# EAGLE board VisualightMicroDIY_03_gnd (EAGLE 6.2)
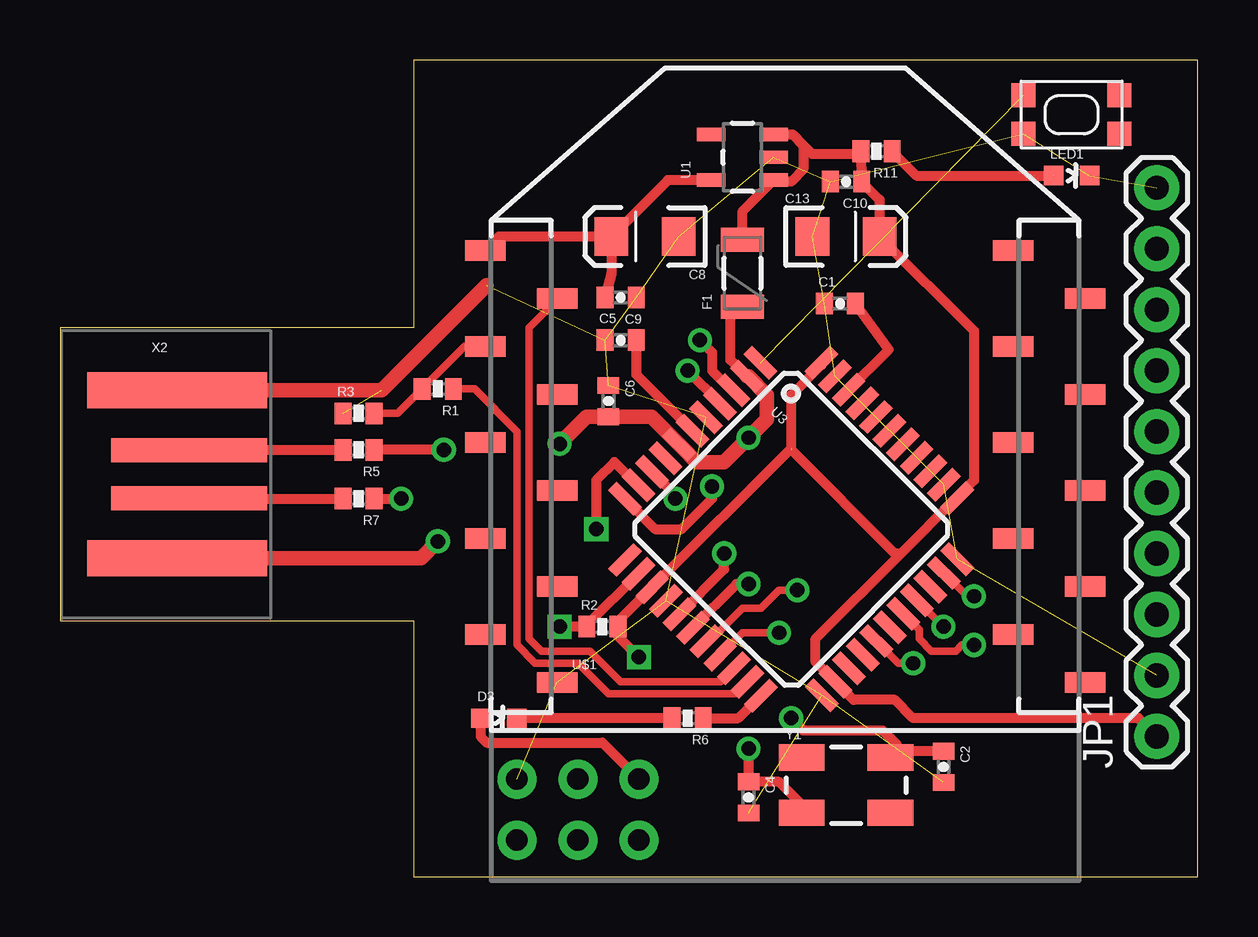
[diagram p0: board, top side]
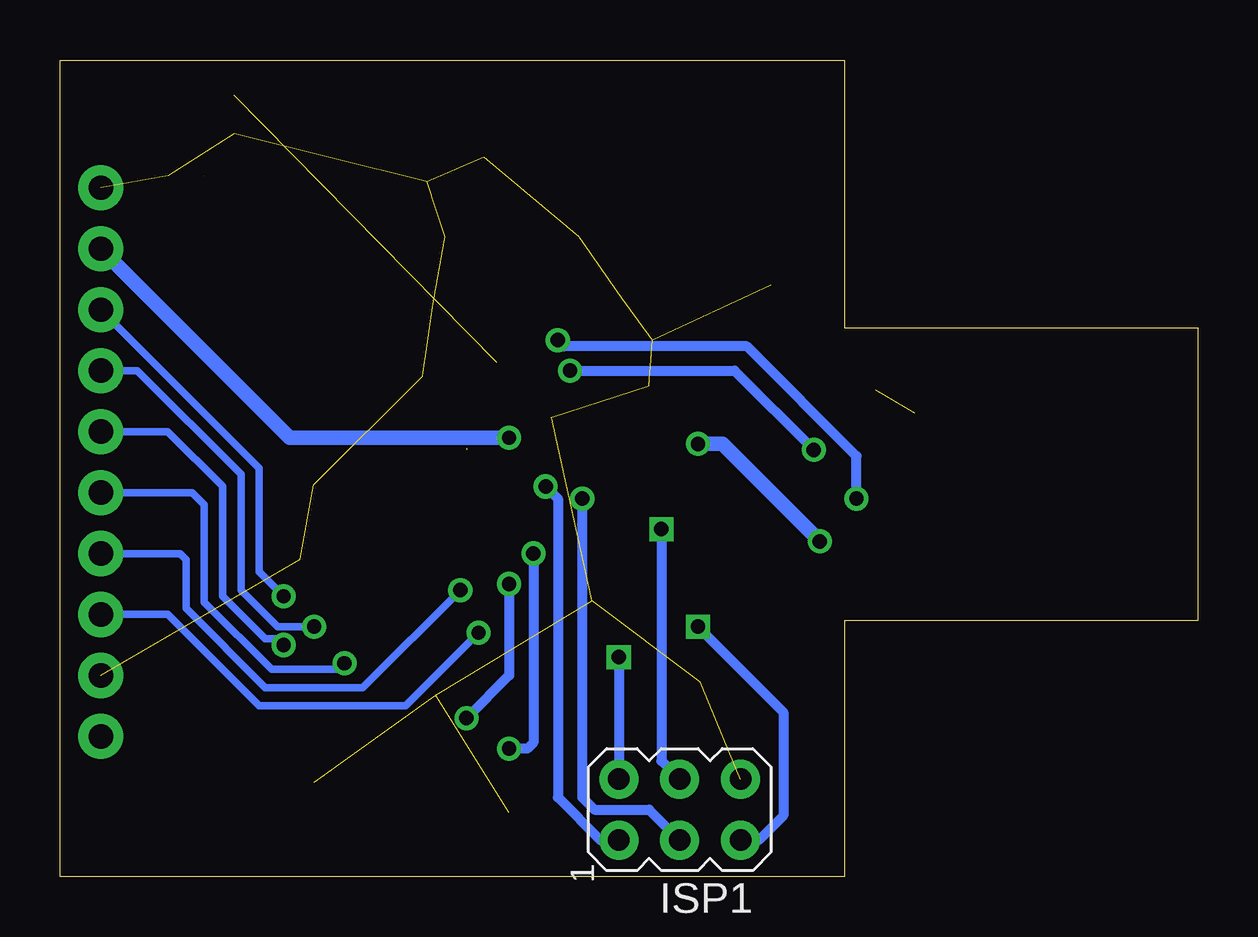
[diagram p1: board, bottom side, seen from below]

Size 47.42 x 34.03 mm. Coordinates in mm from the lower left corner, seen from the top.
Outline: 14.73,0 47.42,0 47.42,34.03 14.73,34.03 14.73,22.86 0,22.86 0,10.67 14.73,10.67 14.73,0
Copper layers (1*16): Top 0.035mm / dielectric 1.5mm / Bottom 0.035mm
Design rules: minimum track width 10mil, minimum drill 24mil, track to track 8mil, track to pad 8mil, pad to pad 8mil, via to via 8mil, smd to smd 8mil, copper to edge 40mil, drill to drill 8mil, minimum pad ring 10mil, minimum via ring 8mil, stop-mask expansion 4mil, vias tented up to drill 0mil, thermal gap 10mil
Net classes: 0 default: width 0.003 mm, drill 0.254 mm, clearance 0.152 mm

## Footprints (pad centres in the part's own frame; a part is rotated, then mirrored left to right if it is on the bottom)
0402-CAP = smd 0.7 x 0.9: 1 -0.65,0; 2 0.65,0
EIA3216 = smd 1.4 x 1.6: A 1.4,0; C -1.4,0
LED-0603 = smd 0.8 x 0.8: A 0,-0.75; C 0,0.75
PTC-1206 = smd 1 x 1.8: 1 -1.4,0; 2 1.4,0
AVRISP = drill 0.9 pad 1.626: 1 -1.27,2.54; 2 1.27,2.54; 3 -1.27,0; 4 1.27,0; 5 -1.27,-2.54; 6 1.27,-2.54
1X10 = drill 1.016 pad 1.88: 1 0,0; 2 2.54,0; 3 5.08,0; 4 7.62,0; 5 10.16,0; 6 12.7,0; 7 15.24,0; 8 17.78,0; 9 20.32,0; 10 22.86,0
0402-RES = smd 0.7 x 0.9: 1 -0.65,0; 2 0.65,0
KMR2 = smd 1 x 1: 1 2,0.8; 2 2,-0.8; 3 -2,0.8; 4 -2,-0.8
SOT23-5 = smd 0.55 x 1.2: 1 -0.95,-1.3; 2 0,-1.3; 3 0.95,-1.3; 4 0.95,1.3; 5 -0.95,1.3
SPARKFUN-DIGITALIC_TQFP44 = smd 1.5 x 0.5: 1 -5.8,4; 2 -5.8,3.2; 3 -5.8,2.4; 4 -5.8,1.6; 5 -5.8,0.8; 6 -5.8,0; 7 -5.8,-0.8; 8 -5.8,-1.6; 9 -5.8,-2.4; 10 -5.8,-3.2; 11 -5.8,-4; 23 5.8,-4; 24 5.8,-3.2; 25 5.8,-2.4; 26 5.8,-1.6; 27 5.8,-0.8; 28 5.8,0; 29 5.8,0.8; 30 5.8,1.6; 31 5.8,2.4; 32 5.8,3.2; 33 5.8,4 | smd 0.5 x 1.5: 12 -4,-5.8; 13 -3.2,-5.8; 14 -2.4,-5.8; 15 -1.6,-5.8; 16 -0.8,-5.8; 17 0,-5.8; 18 0.8,-5.8; 19 1.6,-5.8; 20 2.4,-5.8; 21 3.2,-5.8; 22 4,-5.8; 34 4,5.8; 35 3.2,5.8; 36 2.4,5.8; 37 1.6,5.8; 38 0.8,5.8; 39 0,5.8; 40 -0.8,5.8; 41 -1.6,5.8; 42 -2.4,5.8; 43 -3.2,5.8; 44 -4,5.8
XBEE-SMD = smd 1.7 x 0.85: 1 -12.5,20; 2 -9.5,18; 3 -12.5,16; 4 -9.5,14; 5 -12.5,12; 6 -9.5,10; 7 -12.5,8; 8 -9.5,6; 9 -12.5,4; 10 -9.5,2; 11 12.5,2; 12 9.5,4; 13 12.5,6; 14 9.5,8; 15 12.5,10; 16 9.5,12; 17 12.5,14; 18 9.5,16; 19 12.5,18; 20 9.5,20
USB-A-PCB = smd 7.5 x 1.5: 5V -0.2,-3.5; GND -0.2,3.5 | smd 6.5 x 1: USB_M 0.3,-1; USB_P 0.3,1
CRYSTAL-SMD-5X3 = smd 1.9 x 1.1: 1 -1.85,-1.15; 2 1.85,-1.15; 3 1.85,1.15; 4 -1.85,1.15

## Placement (x,y rotation side)
C1  0.1uF  [0402-CAP]  32.51,23.88 0 top
C2  22pF  [0402-CAP]  36.83,4.57 270 top
C4  22pF  [0402-CAP]  28.7,3.3 270 top
C5  1uF  [0402-CAP]  23.37,22.35 0 top
C6  1uF  [0402-CAP]  22.86,19.81 270 top
C8  10uF  [EIA3216]  24.38,26.67 180 top
C9  0.1uF  [0402-CAP]  23.37,24.13 180 top
C10  1uF  [0402-CAP]  32.77,28.96 180 top
C13  10uF  [EIA3216]  32.77,26.67 0 top
D3  Green  [LED-0603]  18.29,6.6 270 top
F1  500mA  [PTC-1206]  28.45,25.15 90 top
ISP1  AVRISP-6  [AVRISP]  21.59,2.79 90 bottom
JP1  M10"  [1X10]  45.72,5.84 90 top
LED1  Red  [LED-0603]  42.16,29.21 270 top
R1  2.2K  [0402-RES]  15.75,20.32 180 top
R2  10K  [0402-RES]  22.61,10.41 0 top
R3  3.3K  [0402-RES]  12.45,19.3 0 top
R5  22  [0402-RES]  12.45,17.78 180 top
R6  330  [0402-RES]  26.16,6.6 180 top
R7  22  [0402-RES]  12.45,15.75 180 top
R11  1K  [0402-RES]  34.04,30.23 180 top
SW1  SPST_TACT-KMR2  [KMR2]  42.16,31.75 0 top
U1  MIC5219 3.3V  [SOT23-5]  28.45,29.97 90 top
U3  ATMEGA32U4  [SPARKFUN-DIGITALIC_TQFP44]  30.48,14.48 315.1 top
U$1  XBEE-1B3  [XBEE-SMD]  30.23,6.1 0 top
X2  USBPCB  [USB-A-PCB]  5.08,16.76 0 top
Y1  16MHz  [CRYSTAL-SMD-5X3]  32.77,3.81 0 top

## Library data of the parts
C1 C2 C4-C6 C8-C10 C13 D3 F1 LED1 R1-R3 R5-R7 R11 Y1 = SparkFun
ISP1 SW1 = adafruit
JP1 X2 = SparkFun-Connectors
U1 = SparkFun-PowerIC; PROD_ID: VREG-09872
U3 = SparkFun-DigitalIC
U$1 = SparkFun-RF; PROD_ID: CONN-09042

## Nets
+3V3_OUT: C8.A C9.2 U1.5 U$1.1
A0: U3.36
A1: U3.37
A2: U3.38
A3: U3.39
A4: U3.40
A5: U3.41
AREF: C1.2 U3.42
D2: JP1.3 U3.19
D3: JP1.4 U3.18
D4: U3.25
D5: U3.31
D6: JP1.5 U3.27
D7: SW1.3 U3.1
D8: U3.28
D9: JP1.6 U3.29
D10: JP1.7 U3.30
D11: U3.12
D12: U3.26
D13: JP1.8 U3.32
D17: U3.8
D+: R5.1 U3.4
D-: R7.1 U3.3
GND [vcc]: C1.1 C2.2 C4.2 C5.1 C6.1 C8.C C9.1 C10.2 C13.C ISP1.6 JP1.2 JP1.10 LED1.C R3.1 SW1.4 U1.2 U3.5 U3.15 U3.23 U3.33 U3.35 U3.43 U$1.10 X2.GND
MISO: ISP1.1 U3.11
MOSI: ISP1.4 U3.10
N$1: C4.1 U3.16 Y1.1
N$2: C2.1 U3.17 Y1.3
N$4: C5.2 U3.6
N$6: R7.2 X2.USB_M
N$7: D3.C R6.2
N$8: R5.2 X2.USB_P
N$38: LED1.A R11.1
RESET: ISP1.5 R2.1 U3.13
SCK: ISP1.3 U3.9
TX: R1.1 U3.21
TXLED: R6.1 U3.22
UVCC: C6.2 F1.1 JP1.9 U3.2 U3.7 X2.5V
VCC: C10.1 C13.A D3.A F1.2 ISP1.2 JP1.1 R2.2 R11.2 U1.1 U1.3 U3.14 U3.24 U3.34 U3.44
WIFIDIN: R1.2 R3.2 U$1.3
WIFIDOUT: U3.20 U$1.2

## Tracks (layer width: path | path; a pad name or v marks a point on that pad's centre or on a via)
+3V3_OUT
  Top 0.406: C8.A 22.98,25.13 C9.2 | C8.A 18.3,26.67 U$1.1 | U1.5 25.34,29.02 C8.A
AREF
  Top 0.406: U3.42 34.55,21.96 C1.2
D2  (via drill 0.6)
  Top 0.305: v29.97,10.16 28.44,10.16 U3.19
  Bottom 0.305: JP1.3 42.93,10.92 39.12,7.11 33.02,7.11 v29.97,10.16
D3  (via drill 0.6)
  Top 0.305: v30.73,11.94 29.97,11.94 29.21,11.18 28.45,11.18 26.92,9.65 26.92,9.78 U3.18
  Bottom 0.305: JP1.4 42.42,13.46 42.16,13.21 42.16,11.18 38.86,7.87 34.8,7.87 v30.73,11.94
D6  (via drill 0.6)
  Top 0.305: v35.56,8.89 34.95,8.89 U3.27
  Bottom 0.305: JP1.5 41.91,16 41.4,15.49 41.4,11.43 38.61,8.64 35.81,8.64 v35.56,8.89
D7  (1 unrouted)
D9  (via drill 0.6)
  Top 0.305: v38.1,9.65 37.59,9.65 37.34,9.4 36.32,9.4 35.81,9.91 35.81,10.29 U3.29
  Bottom 0.305: JP1.6 42.93,18.54 40.64,16.26 40.64,11.68 38.86,9.91 38.35,9.91 v38.1,9.65
D10  (via drill 0.6)
  Top 0.305: v36.83,10.41 36.82,10.41 U3.30
  Bottom 0.305: JP1.7 44.2,21.08 39.88,16.76 39.88,11.94 38.35,10.41 v36.83,10.41
D13  (via drill 0.6)
  Top 0.305: v38.1,11.68 37.81,11.68 U3.32
  Bottom 0.305: JP1.8 39.12,17.02 39.12,12.7 v38.1,11.68
D+  (via drill 0.6)
  Top 0.406: U3.4 27.5,19.74 v26.16,21.08 | v16,17.78 R5.1
  Bottom 0.406: v26.16,21.08 19.3,21.08 v16,17.78
D-  (via drill 0.6)
  Top 0.406: R7.1 v14.22,15.75 | v26.67,22.35 27.18,21.84 27.18,21.08 27.99,20.27 U3.3
  Bottom 0.406: v14.22,15.75 14.22,17.53 18.8,22.1 26.42,22.1 v26.67,22.35
GND  (23 unrouted)
  Top 0.61: X2.GND 13.41,20.26 17.78,24.64
MISO  (via drill 0.6)
  Top 0.406: U3.11 24.81,14.48 25.91,14.48 27.18,15.75 v27.18,16.26
  Bottom 0.406: v27.18,16.26 26.67,15.75 26.67,3.3 24.89,1.52 ISP1.1
MOSI  (via drill 0.6)
  Top 0.406: U3.10 24.08,16.3 23.11,17.27 22.35,16.51 v22.35,14.48
  Bottom 0.406: v22.35,14.48 22.35,4.83 ISP1.4
N$1  (via drill 0.6)
  Top 0.406: Y1.1 30.92,3.01 29.97,3.95 C4.1 v28.7,5.33 | U3.16 27.69,12.8 v27.69,13.46
  Bottom 0.406: v27.69,13.46 27.69,5.59 27.94,5.33 v28.7,5.33
N$2  (via drill 0.6)
  Top 0.406: C2.1 34.88,5.22 | 34.88,5.22 Y1.3 | U3.17 28.19,12.19 v28.7,12.19 | v30.48,6.6 30.99,6.1 34.29,6.1 34.88,5.51 34.88,5.22
  Bottom 0.406: v28.7,12.19 28.7,8.38 v30.48,6.6
N$4
  Top 0.406: C5.2 24.02,20.93 U3.6
N$6
  Top 0.305: X2.USB_M 5.4,15.75
  Top 0.406: 5.4,15.75 R7.2
N$7
  Top 0.406: R6.2 D3.C
N$8
  Top 0.305: X2.USB_P 5.4,17.78
  Top 0.406: 5.4,17.78 R5.2
N$38  (1 unrouted)
  Top 0.406: R11.1 35.7,29.21 LED1.A
RESET  (via drill 0.6)
  Top 0.406: U3.13 21.96,10.47 R2.1 v20.83,10.41
  Bottom 0.406: v20.83,10.41 17.27,6.86 17.27,2.54 18.29,1.52 ISP1.5
SCK  (via drill 0.6)
  Top 0.406: U3.9 25.65,15.9 v25.65,15.75
  Bottom 0.406: v25.65,15.75 25.65,3.3 25.15,2.79 22.86,2.79 ISP1.3
TX
  Top 0.305: U3.21 28.16,7.62 22.86,7.62 21.59,8.89 19.81,8.89 19.05,9.65 19.05,18.54 17.27,20.32 R1.1
TXLED
  Top 0.406: R6.1 28.28,6.6 U3.22
UVCC  (via drill 0.6)
  Top 0.406: U3.2 27.94,21.53 27.94,23.62 28.06,23.75 F1.1
  Top 0.61: U3.2 28.69,20.84 29.46,20.07 29.46,19.05 v28.7,18.29 27.69,17.27 26.54,17.27 25.97,17.84 U3.7 24.65,19.16 C6.2 21.96,19.16 v20.83,18.03 | X2.5V 15.04,13.26 v15.75,13.97
  Bottom 0.61: v28.7,18.29 37.85,18.29 JP1.9 | v15.75,13.97 19.81,18.03 v20.83,18.03
VCC  (via drill 0.6)  (1 unrouted)
  Top 0.406: U3.44 31.74,21.33 30.48,20.07 30.48,17.86 U3.14 23.26,10.63 R2.2 23.26,10.02 v24.13,9.14 | 35.05,13.46 37.35,15.76 U3.34 37.41,15.82 38.1,16.51 38.1,22.74 C13.A 34.17,28.21 C10.1 R11.2 33.27,30.11 31.36,30.11 30.99,30.48 | 35.05,13.46 31.5,9.91 31.5,8.95 U3.24 33.08,7.37 34.8,7.37 35.56,6.6 44.96,6.6 JP1.1 | 35.05,13.46 34.8,13.46 30.48,17.78 | D3.A 17.54,5.83 17.78,5.59 22.61,5.59 ISP1.2 | F1.2 28.45,27.72 U1.1 29.81,28.96 30.48,28.96 30.99,29.46 30.99,30.48 | U1.3 30.55,30.92 30.99,30.48
  Bottom 0.406: v24.13,9.14 ISP1.2
WIFIDIN
  Top 0.305: U$1.3 16.87,22.1 R1.2 14.08,19.3 R3.2
WIFIDOUT
  Top 0.305: U3.20 27.54,8.13 23.37,8.13 22.1,9.4 20.07,9.4 19.56,9.91 19.56,22.86 20.73,24.03 U$1.2